# Altium PCB Gold_New.PCBDoc
Units mil, origin at the board's own origin, x right, y up, seen from the top; angles counter-clockwise.
Board outline 4705.63 x 1945.5 mil, 2 copper layers (Top Layer, Bottom Layer); 11 components, 64 nets, 196 pads, 18 vias.
Unrouted connection lines stored in the file: 11.
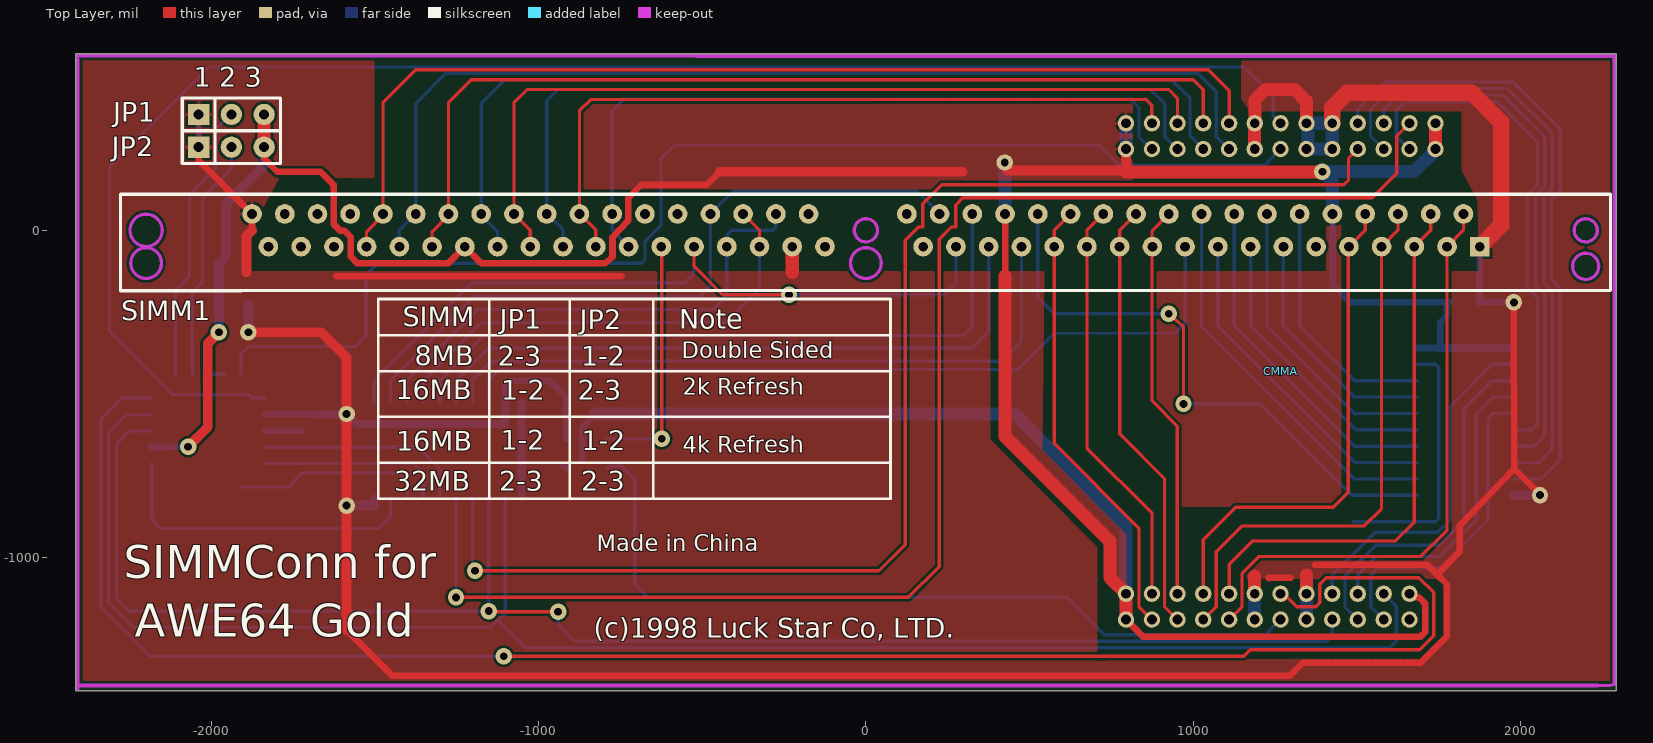
[diagram p0: Top Layer view]
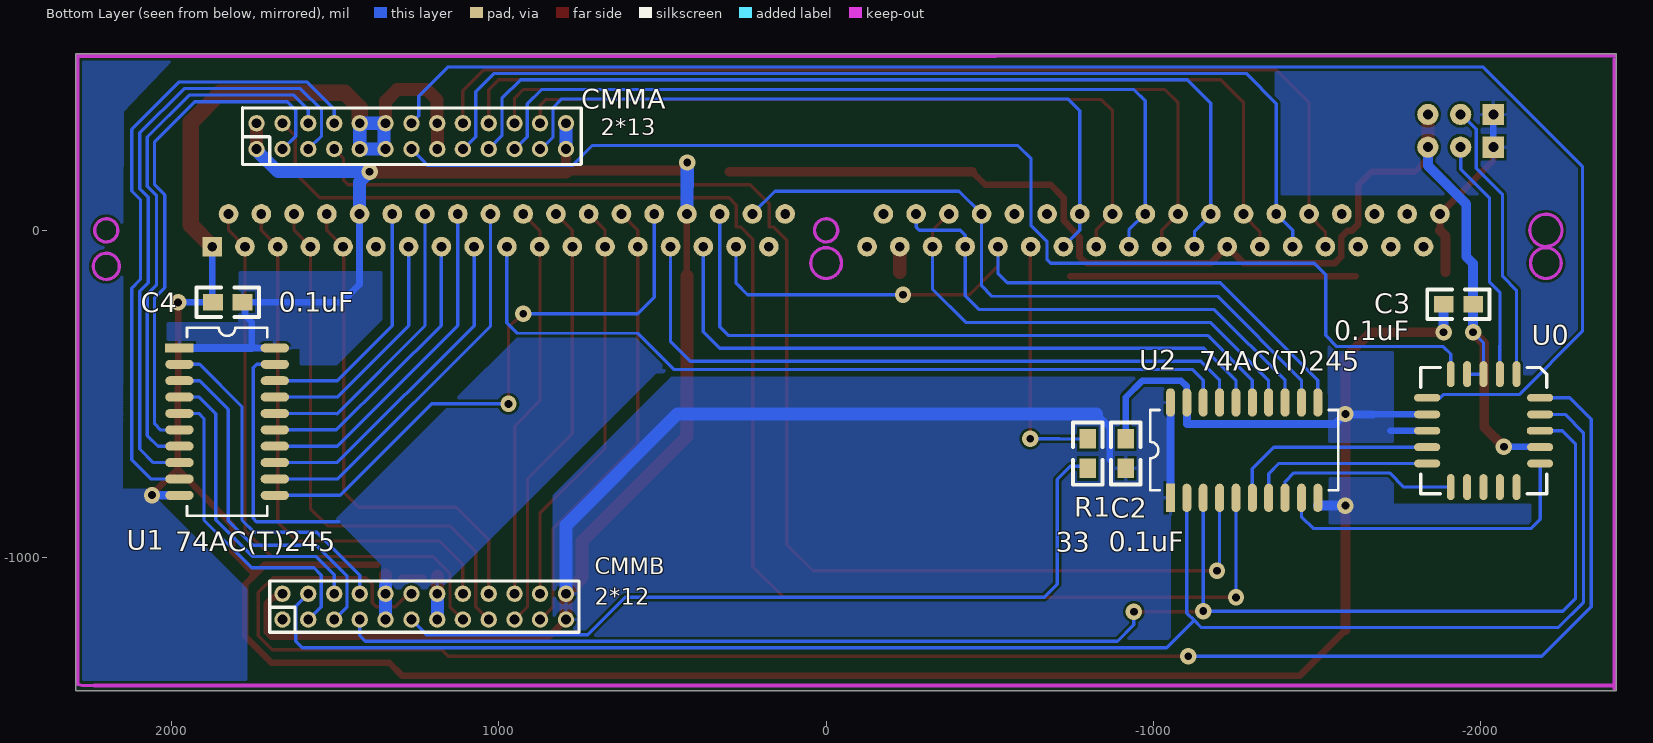
[diagram p1: Bottom Layer view, seen from below]

## Layer stack, top to bottom
Top Solder: solder mask 0.4, Solder Resist, Dk 3.5
Top Layer: signal copper 1.4
Dielectric 1: dielectric 12.6, FR-4, Dk 4.8
Bottom Layer: signal copper 1.4
Bottom Solder: solder mask 0.4, Solder Resist, Dk 3.5

## Board outline
-2413.63,-1406 2292,-1406 2292,539.5 -2413.63,539.5

## Design rules (kind name [scope] priority, off if disabled: settings)
Clearance [All] p1: gap=8 ignorepadtopadclearanceinfootprint=FALSE
PlaneClearance [All] p1: clearance=10
PolygonConnect [All] p1: connectstyle=Relief reliefconductorwidth=10 reliefentries=4 polygonreliefangle="90 Angle" airgapwidth=10
RoutingPriority RoutingPriority_28 [InNet('D15_1')] p1: routingpriority=2
RoutingPriority RoutingPriority_27 [InNet('D14_1')] p2: routingpriority=2
RoutingPriority RoutingPriority_26 [InNet('D13_1')] p3: routingpriority=2
RoutingPriority RoutingPriority_25 [InNet('D12_1')] p4: routingpriority=2
RoutingPriority RoutingPriority_24 [InNet('D11_1')] p5: routingpriority=2
RoutingPriority RoutingPriority_23 [InNet('D10_1')] p6: routingpriority=2
RoutingPriority RoutingPriority_22 [InNet('D9_1')] p7: routingpriority=2
RoutingPriority RoutingPriority_21 [InNet('D8_1')] p8: routingpriority=2
RoutingPriority RoutingPriority_20 [InNet('D7_1')] p9: routingpriority=2
RoutingPriority RoutingPriority_19 [InNet('D6_1')] p10: routingpriority=2
RoutingPriority RoutingPriority_18 [InNet('D5_1')] p11: routingpriority=2
RoutingPriority RoutingPriority_17 [InNet('D4_1')] p12: routingpriority=2
RoutingPriority RoutingPriority_16 [InNet('D3_1')] p13: routingpriority=2
RoutingPriority RoutingPriority_15 [InNet('D2_1')] p14: routingpriority=2
RoutingPriority RoutingPriority_14 [InNet('D1_1')] p15: routingpriority=2
RoutingPriority RoutingPriority_13 [InNet('D0_1')] p16: routingpriority=2
RoutingPriority RoutingPriority_12 [InNet('AB11_1')] p17: routingpriority=3
RoutingPriority RoutingPriority_11 [InNet('AB10_1')] p18: routingpriority=3
RoutingPriority RoutingPriority_10 [InNet('AB9_1')] p19: routingpriority=3
RoutingPriority RoutingPriority_9 [InNet('AB8_1')] p20: routingpriority=3
RoutingPriority RoutingPriority_8 [InNet('AB7_1')] p21: routingpriority=3
RoutingPriority RoutingPriority_7 [InNet('AB6_1')] p22: routingpriority=3
RoutingPriority RoutingPriority_6 [InNet('AB5_1')] p23: routingpriority=3
RoutingPriority RoutingPriority_5 [InNet('AB4_1')] p24: routingpriority=3
RoutingPriority RoutingPriority_4 [InNet('AB3_1')] p25: routingpriority=3
RoutingPriority RoutingPriority_3 [InNet('AB2_1')] p26: routingpriority=3
RoutingPriority RoutingPriority_2 [InNet('AB1_1')] p27: routingpriority=3
RoutingPriority RoutingPriority_1 [InNet('AB0_1')] p28: routingpriority=3
RoutingPriority [All] p29: routingpriority=4
RoutingVias RoutingVias_2 [InNet('GND')] p1: holewidth=20 width=60 viastyle="Through Hole" minholewidth=28 minwidth=50 maxholewidth=28 maxwidth=50
RoutingVias RoutingVias_1 [InNet('VCC')] p2: holewidth=20 width=60 viastyle="Through Hole" minholewidth=28 minwidth=50 maxholewidth=28 maxwidth=50
RoutingVias [All] p3: holewidth=20 width=50 viastyle="Through Hole" minholewidth=28 minwidth=50 maxholewidth=28 maxwidth=50
SolderMaskExpansion [All] p1: expansion=2
Width Width_2 [InNet('GND')] p1: maxlimit=50 minlimit=50 preferedwidth=10
Width Width_1 [InNet('VCC')] p2: maxlimit=50 minlimit=50 preferedwidth=10
Width [All] p3: maxlimit=10 minlimit=10 preferedwidth=10
28 further rules are at their usual default settings.

## Components (designator, comment, footprint, x,y, rotation, side; value= is the part's Value field where it differs from the comment)
C2 "0.1uF" 0805 -915.3,-726.6 r90 bottom
C3 "0.1uF" 0805 -1976.2,-226.16 r0 bottom
C4 "0.1uF" 0805 1782.5,-220.25 r0 bottom
CMMA "CMM50" CMM50 1666.4,-1190.02 r0 top
JP1 "1 2 3" SIP3 -2038,353.96 r0 top
JP2 "" SIP3 -2038,253.96 r0 top
R1 "33" 0805 -799.66,-727.14 r90 bottom
SIMM1 "SIMM72" SIMMr 0,0 r0 top
U0 "PALCE16V8H7JC/5(20)" PLCC20 -2180.86,-612.3 r270 bottom
U1 "74AC(T)245" SOP20 1975.1,-359.44 r180 bottom
U2 "74AC(T)245" SOP20 -1051.89,-817.08 r90 bottom

## Footprints (in the part's own frame and the unit in brackets; to place one, negate y for a bottom-side part, rotate by r counter-clockwise, add the part's x,y. Pads: shape width x height; smd on the part's side, far side on the other; paste and mask are expansions set on the pad)
0805 [mil]
  rect 60x50 smd: 1(0,0) 2(90,0)
  silkscreen extent -50,-45 140,45
CMM50 [mil]
  round 50 hole 30: 1-1(-6,1) 1-2(-6,80) 1-3(-85,1) 1-4(-85,80) 1-5(-164,1) 1-6(-164,80) 1-7(-242,1) 1-8(-242,80) 1-9(-321,1) 1-10(-321,80) 1-11(-400,1) 1-12(-400,80) 1-13(-479,1) 1-14(-479,80) 1-15(-557,1) 1-16(-557,80) 1-17(-636,1) 1-18(-636,80) 1-19(-715,1) 1-20(-715,80) 1-21(-793,1) 1-22(-793,80) 1-23(-872,1) 1-24(-872,80) 2-1(73,1438) 2-2(73,1517) 2-3(-6,1438) 2-4(-6,1517) 2-5(-85,1438) 2-6(-85,1517) 2-7(-164,1438) 2-8(-164,1517) 2-9(-242,1438) 2-10(-242,1517) 2-11(-321,1438) 2-12(-321,1517) 2-13(-400,1438) 2-14(-400,1517) 2-15(-479,1438) 2-16(-479,1517) 2-17(-557,1438) 2-18(-557,1517) 2-19(-636,1438) 2-20(-636,1517) 2-21(-715,1438) 2-22(-715,1517) 2-23(-793,1438) 2-24(-793,1517) 2-25(-872,1438) 2-26(-872,1517)
PLCC20 [mil]
  oct 24x80 smd: 1(0,0)
  oval 24x80 smd: 2(-50,0) 3(-101,0) 9(-101,-345) 10(-50,-345) 11(0,-345) 12(50,-345) 13(100,-345) 19(100,0) 20(50,0)
  oval 80x24 smd: 4(-173,-72) 5(-173,-123) 6(-173,-173) 7(-173,-223) 8(-173,-273) 14(172,-273) 15(172,-223) 16(172,-173) 17(172,-123) 18(172,-72)
  silkscreen extent -193,-365 192,20
SIMMr [mil]
  rect 60x60 hole 30: 1(1875,-50)
  round 60 hole 30: 2(1825,50) 3(1775,-50) 4(1725,50) 5(1675,-50) 6(1625,50) 7(1575,-50) 8(1525,50) 9(1475,-50) 10(1425,50) 11(1375,-50) 12(1325,50) 13(1275,-50) 14(1225,50) 15(1175,-50) 16(1125,50) 17(1075,-50) 18(1025,50) 19(975,-50) 20(925,50) 21(875,-50) 22(825,50) 23(775,-50) 24(725,50) 25(675,-50) 26(625,50) 27(575,-50) 28(525,50) 29(475,-50) 30(425,50) 31(375,-50) 32(325,50) 33(275,-50) 34(225,50) 35(175,-50) 36(125,50) 37(-125,-50) 38(-175,50) 39(-225,-50) 40(-275,50) 41(-325,-50) 42(-375,50) 43(-425,-50) 44(-475,50) 45(-525,-50) 46(-575,50) 47(-625,-50) 48(-675,50) 49(-725,-50) 50(-775,50) 51(-825,-50) 52(-875,50) 53(-925,-50) 54(-975,50) 55(-1025,-50) 56(-1075,50) 57(-1125,-50) 58(-1175,50) 59(-1225,-50) 60(-1275,50) 61(-1325,-50) 62(-1375,50) 63(-1425,-50) 64(-1475,50) 65(-1525,-50) 66(-1575,50) 67(-1625,-50) 68(-1675,50) 69(-1725,-50) 70(-1775,50) 71(-1825,-50) 72(-1875,50)
  Keep-Out Layer circle w10: c-2198.43,0 r49.21
  Keep-Out Layer circle w10: c2198.43,0 r35.43
  Keep-Out Layer circle w10: c0,0 r35.43
  Keep-Out Layer circle w10: c0,-100 r47
  Keep-Out Layer circle w10: c2198.43,-110 r40
  Keep-Out Layer circle w10: c-2198.43,-100 r47
  silkscreen extent -2276,-185 2274,110
SIP3 [mil]
  rect 65x65 hole 30: 1(0,0)
  round 65 hole 30: 2(100,0) 3(200,0)
  silkscreen extent -50,-50 250,50
SOP20 [mm]
  rect 2.2x0.7 smd: 1(0,0)
  oval 2.2x0.7 smd: 2(0,-1.27) 3(0,-2.54) 4(0,-3.81) 5(0,-5.08) 6(0,-6.35) 7(0,-7.62) 8(0,-8.89) 9(0,-10.16) 10(0,-11.43) 11(7.4,-11.43) 12(7.4,-10.16) 13(7.4,-8.89) 14(7.4,-7.62) 15(7.4,-6.35) 16(7.4,-5.08) 17(7.4,-3.81) 18(7.4,-2.54) 19(7.4,-1.27) 20(7.4,0)
  silkscreen extent 0.59,-13 6.81,1.57

## Via types
v1: diameter 50, hole 24, Top Layer to Bottom Layer, 18 vias

## Nets (pads, with @x,y where several pads share a name; then routed paths per layer and width w, separated by ;. In a path a pad name is that pad's centre, name@x,y a point inside that pad or via, vN(x,y) a via of type N, cw(c..) or ccw(c..) an arc to the next point about the centre after c; other vN are vias at no path point)
A0_1: CMMA.1-8 U1.2 | length 1076.6
  Bottom Layer w10: CMMA.1-8 1424.4,-1053.6 1556,-922 1747,-922 1784,-885 1784,-539 1913.56,-409.44 U1.2
A1_1: CMMA.1-5 U1.3 | length 1107.7
  Bottom Layer w10: CMMA.1-5 1463,-1149.62 1463,-1056 1557,-962 1751,-962 1826,-887 1826,-547 1913.56,-459.44 U1.3
A2_1: CMMA.1-6 U1.4 | length 945.8
  Bottom Layer w10: CMMA.1-6 1502,-1109.62 1502,-1052 1558,-996 1752,-996 1864,-884 1864,-560 1914.56,-509.44 U1.4
A3_1: CMMA.1-3 U1.5 | length 971.7
  Bottom Layer w10: CMMA.1-3 1581.02,-1189.02 1542,-1150 1542,-1053 1564,-1031 1754,-1031 1900,-885 1900,-575 1915.56,-559.44 U1.5
A4_1: CMMA.2-3 U1.6 | length 1600.6
  Bottom Layer w10: CMMA.2-3 1660.98,247.98 1660.68,248.28 1620,287 1620,367 1646,393 1928,393 2051,270 2051,139 2020,108 2020,-175 2051,-206 2051,-591 2032,-610 1975.66,-610 U1.6
A5_1: CMMA.2-6 U1.7 | length 1651
  Bottom Layer w10: CMMA.2-6 1581.4,368.4 1626,413 1945,413 2073,285 2073,134 2045,106 2045,-167 2073,-195 2073,-627 2040.56,-659.44 U1.7
A6_1: CMMA.2-5 U1.8 | length 1900.4
  Bottom Layer w10: CMMA.2-5 1581.4,248.4 1541,288 1541,368 1606,433 1961,433 2096,298 2096,127 2070,101 2070,-160 2096,-186 2096,-668 2054.56,-709.44 U1.8
A7_1: CMMA.2-8 U1.9 | length 1957.2
  Bottom Layer w10: CMMA.2-8 1502.4,369.4 1586,453 1976,453 2121,308 2121,120 2094,93 2094,-150 2121,-177 2121,-701 2062.56,-759.44 U1.9
A8_1: CMMA.2-7 U2.4 | length 4087.1
  Top Layer w10: v1(-1194,-1040) -879,-1040 -877,-1040 40,-1040 120,-960 120,-30 160,10 174,10 174,81 232,139 1460,139 1474,153 1474,219.59 CMMA.2-7
  Bottom Layer w10: v1@-1201.89,-1048.89 U2.4
A9_1: CMMA.2-4 U2.5 | length 4508.2
  Top Layer w10: v1(-1252,-1121) 130,-1121 224,-1027 224,-27 260,10 274,10 274,77 296,99 1546,99 1621,174 1621,288 1659.98,326.98 CMMA.2-4
  Bottom Layer w10: v1(-1252,-1121) -1252,-817.18 U2.5
A10_1: CMMA.1-4 U0.2 U2.2 | length 5235
  Bottom Layer w10: U0.2 -2257.3,-562.3 -2313,-618 -2313,-1137 -2236.89,-1213.11 -1145.89,-1213.11 -1123.89,-1191.11 ; U2.2 -1101.89,-1169.11 -1123.89,-1191.11 ; CMMA.1-4 1620,-1148.62 1620,-1255 1600,-1275 -1040,-1275 -1123.89,-1191.11
A11_1: CMMA.1-7 U0.1 U2.3 | length 4788.4
  Top Layer w10: v1(-1151.89,-1163.11) -1145,-1165 v1(-940,-1165)
  Bottom Layer w10: U0.1 -2248.3,-612.3 -2289,-653 -2289,-1124 -2249.89,-1163.11 v1(-1151.89,-1163.11) U2.3 ; v1(-940,-1165) -940,-1205 -890,-1255 1407,-1255 1424.4,-1237.6 CMMA.1-7
AB0_1: SIMM1.12 U1.18 | length 770.5
  Bottom Layer w10: SIMM1.12@1325,51 SIMM1.12 1325,-291 1493.44,-459.44 U1.18
AB1_1: SIMM1.13 U1.17 | length 740.2
  Bottom Layer w10: SIMM1.13 1275,-291 1493.44,-509.44 U1.17
AB2_1: SIMM1.14 U1.16 | length 911.7
  Bottom Layer w10: SIMM1.14 1225,-291 1493.44,-560.44 U1.16
AB3_1: SIMM1.15 U1.15 | length 881.1
  Bottom Layer w10: SIMM1.15 1175,-291 1495.44,-609.44 U1.15
AB4_1: SIMM1.16 U1.14 | length 1052.7
  Bottom Layer w10: SIMM1.16 1125,-291 1492.44,-659.44 U1.14
AB5_1: SIMM1.17 U1.13 | length 1023.2
  Bottom Layer w10: SIMM1.17 1075,-292 1493,-709 1676.2,-709 U1.13
AB6_1: SIMM1.18 U1.12 | length 1195
  Bottom Layer w10: SIMM1.18 1025,-293 1491.44,-759.44 U1.12
AB7_1: SIMM1.28 U1.11 | length 1800.4
  Top Layer w10: v1(925,-255) 970,-295 v1(970,-530)
  Bottom Layer w10: SIMM1.28 525,-205 575,-255 v1(925,-255) ; v1(970,-530) 1205,-530 1484.44,-809.44 U1.11
AB8_1: SIMM1.31 U2.16 | length 2016
  Bottom Layer w10: U2.16 -1251.89,-457.89 -1154,-360 325,-360 375,-310 SIMM1.31
AB9_1: SIMM1.32 U2.15 | length 2107.2
  Bottom Layer w10: U2.15 -1301.89,-457.89 -1165,-321 299,-321 325,-295 SIMM1.32
AB10_1: SIMM1.19 U2.18 | length 2499.8
  Bottom Layer w10: U2.18 -1151.89,-457.89 -1120,-426 465,-425 575,-315 943,-314 975,-282 SIMM1.19 SIMM1.19@975,-49
AB11_1: SIMM1.29 U2.17 | length 2084.6
  Bottom Layer w10: U2.17 -1201.89,-457.89 -1144,-400 415,-400 475,-340 SIMM1.29 SIMM1.29@475,-49
BASEM1_1: CMMA.2-14 U0.9 | length 4871.3
  Bottom Layer w10: U0.9 -1863.86,-511.3 -1874,-513.3 -1886,-501.3 -2118,-501 -2310,-309 -2310,195 -2006,499 1154,499 1244,409 1244,349.38 CMMA.2-14
BCAS0_1: SIMM1.40 SIMM1.43 U2.13 | length 1536.5
  Bottom Layer w10: U2.13 -1401.89,-457.89 -1186,-242 -466,-241 -425,-200 SIMM1.43 -425,-15 -410,0 -285,0 -275,10 SIMM1.40
BCAS2_1: SIMM1.41 SIMM1.42 U2.14 | length 1493.2
  Top Layer w10: SIMM1.42 -325,0 SIMM1.41
  Bottom Layer w10: U2.14 -1351.89,-501 -1351,-518 -1351,-458 -1175,-282 -426,-281 -325,-180 SIMM1.41
BRAS0_1: SIMM1.34 SIMM1.44 U2.12 | length 2170.3
  Bottom Layer w10: U2.12@-1451.89,-496.21 U2.12 -1451.89,-457.89 -1196,-202 -506,-201 -475,-170 SIMM1.44 -406,119 156,119 SIMM1.34
BRAS1_1: SIMM1.33 SIMM1.45 U2.11 | length 2283.7
  Top Layer w10: SIMM1.45 -525,-110 -438,-197 v1(-235,-197)
  Bottom Layer w10: U2.11 -1501.89,-457.89 -1204,-160 -554,-160 -525,-131 SIMM1.45 ; v1(-235,-197) 240,-197 275,-162 SIMM1.33
C\A\S\_1: CMMA.2-13 U0.8 | length 3805.7
  Bottom Layer w10: U0.8 -1907.86,-377.86 -1885,-355 -1560,-355 -1526,-321 -1526,-136 -1491,-101 -686,-101 -675,-90 -675,-35 -626,14 -626,219 -586,259 714,259 774,199 1218,199 1234,215 1234,215.59 CMMA.2-13
CAS0_1: U0.13 U2.7 | length 570.7
  Bottom Layer w10: U0.13 -1382.7,-712.3 -1351.89,-743.11 U2.7
CAS2_1: U0.12 U2.6 | length 650.2
  Bottom Layer w10: U0.12 -1367.7,-662.3 -1301.89,-728.11 U2.6
CASD_1: U0.15
CBR_1: U0.16
D0_1: CMMA.1-15 SIMM1.2 SIMM1.3 | length 1825.4
  Top Layer w10: CMMA.1-15 1109.4,-1188.6 1110.4,-1188.6 1149,-1150 1149,-1048 1201,-996 1695,-996 1775,-916 SIMM1.3 1825,0 SIMM1.2
D1_1: CMMA.1-16 SIMM1.4 SIMM1.5 | length 1669.7
  Top Layer w10: CMMA.1-16 1109.4,-1020.6 1180,-950 1616,-949 1675,-891 SIMM1.5 1725,0 SIMM1.4
D2_1: CMMA.1-17 SIMM1.6 SIMM1.7 | length 1704.2
  Top Layer w10: CMMA.1-17 1030.98,-1189.02 1070,-1150 1070,-982 1149,-903 1522,-903 1575,-850 SIMM1.7 1625,0 SIMM1.6
D3_1: CMMA.1-18 SIMM1.8 SIMM1.9 | length 1538.7
  Top Layer w10: CMMA.1-18 1030.4,-944.6 1129,-846 1427,-846 1473,-800 1473,-68 SIMM1.9 1525,0 SIMM1.8
D4_1: CMMA.1-20 SIMM1.20 SIMM1.21 | length 1212.5
  Top Layer w10: SIMM1.20 874,-2 874,-521 951,-599 951,-1108.02 CMMA.1-20
D5_1: CMMA.1-19 SIMM1.22 SIMM1.23 | length 1332.8
  Top Layer w10: SIMM1.22 775,0 SIMM1.23 775,-622 912,-759 912,-1149.62 CMMA.1-19
D6_1: CMMA.1-22 SIMM1.24 SIMM1.25 | length 1263.2
  Top Layer w10: SIMM1.24 675,0 SIMM1.25 675,-665 874,-864 874,-1073.02 CMMA.1-22
D7_1: CMMA.1-21 SIMM1.26 SIMM1.27 | length 1383.3
  Top Layer w10: SIMM1.26 575,0 SIMM1.27 575,-651 834,-910 834,-1149.62 CMMA.1-21
D8_1: CMMA.2-23 SIMM1.49 SIMM1.50 | length 2215.3
  Bottom Layer w10: SIMM1.49 -775,0 SIMM1.50 -775,365 -740,400 -740,401 809,400 834,375 834,285 871.01,247.98 CMMA.2-23
D9_1: CMMA.2-24 SIMM1.51 SIMM1.52 | length 2260.4
  Top Layer w10: SIMM1.51 -825,1 SIMM1.52 -875,365 -840,399 855,400 873.4,381.6 CMMA.2-24
D10_1: CMMA.2-21 SIMM1.53 SIMM1.54 | length 2541.6
  Bottom Layer w10: SIMM1.54 SIMM1.54@-975,51 ; SIMM1.53 -925,1 SIMM1.54@-975,51 ; CMMA.2-21 951.01,247.98 913,286 913,386 869,430 -940,430 -975,395 SIMM1.54@-975,51
D11_1: CMMA.2-22 SIMM1.55 SIMM1.56 | length 2595.2
  Top Layer w10: SIMM1.55@-1025,-54 SIMM1.55 -1025,0 SIMM1.56 -1075,390 -1035,430 925,430 951.4,403.6 CMMA.2-22
D12_1: CMMA.2-19 SIMM1.57 SIMM1.58 | length 2852.9
  Bottom Layer w10: SIMM1.57@-1125,-54 SIMM1.57 -1125,-4 -1175,46 SIMM1.58 -1175,388 -1103,460 933,460 990,403 990,288.38 CMMA.2-19
D13_1: CMMA.2-20 SIMM1.60 SIMM1.61 | length 2914.3
  Top Layer w10: SIMM1.61@-1325,-54 SIMM1.61 -1325,-4 -1275,46 SIMM1.60 -1275,390 -1205,460 1000,460 1030.4,429.6 CMMA.2-20
D14_1: CMMA.2-17 SIMM1.62 SIMM1.63 | length 3156.2
  Bottom Layer w10: SIMM1.63 -1425,0 SIMM1.62 -1375,387 -1283,479 1014,479 1070,423 1070,286 1108.01,247.98 CMMA.2-17
D15_1: CMMA.2-18 SIMM1.64 SIMM1.65 | length 3215.8
  Top Layer w10: SIMM1.65@-1525,-54 SIMM1.65 -1525,-4 -1475,46 SIMM1.64 -1475,390 -1375,490 1045,490 1109.4,425.6 CMMA.2-18
GND: C2.2 C3.2 C4.2 CMMA.1-9 CMMA.1-10 CMMA.1-13 CMMA.1-14 CMMA.2-9 CMMA.2-10 CMMA.2-11 CMMA.2-12 CMMA.2-15 CMMA.2-16 JP1.1 JP2.1 SIMM1.1 SIMM1.39 SIMM1.72 U0.10 U0.11 U1.10 U1.19 U2.10 U2.19 | length 12643.4
  Top Layer w20: JP2.1 -2038,213 SIMM1.72 -1875,-1 ; -1617,-141 -746,-141 ; -1586,-1221 -1446,-1361 1294,-1361 1334,-1321 1694,-1321 1774,-1241 1774,-1081 1744,-1051 ; CMMA.2-16@1174,326.98 CMMA.2-16 ; CMMA.1-14 1187.4,-1101 1189.72,-1101.64 CMMA.1-14@1191,-1102 ; 1231,-1062 1297,-1061 ; CMMA.2-12@1334,339 1334,326.98 CMMA.2-12 ; 1371,-1021 1714,-1021 1744,-1051 ; v1@1987,-217 1983.04,-222.94 1979,-229 1980,-728 ; v1@2060,-808 1980,-728 ; 1744,-1051 1814,-981 1814,-901 1980,-728
  Top Layer w30: -1892,-128 -1892,-18 -1875,-1 ; v1(-1886.2,-311.2) -1663.8,-311.2 -1586,-389 v1(-1586,-561) v1(-1586,-841) -1586,-1221
  Top Layer w40: -225,-128 SIMM1.39 ; CMMA.1-14 1187.4,-1056.4 ; CMMA.2-15 CMMA.2-16 1188,327.59 1188,398 1220,430 1310,430 1345.4,394.6 CMMA.2-12 ; CMMA.1-10 1345.4,-1052.4
  Top Layer w50: CMMA.2-10 1424.4,374.4 1470,420 1850,420 1940,330 1940,15 SIMM1.1
  Bottom Layer w10: 1488.82,-890 1740,-890 1750,-880 1750,-420 1739.44,-409.44 U1.19
  Bottom Layer w20: JP2.1 JP1.1 ; U0.11 -1722.7,-612.3 ; U0.10 -1670,-562.3 ; v1@-1587.3,-562.3 v1(-1586,-561) ; U2.10@-1501.89,-841 U2.10 ; U2.19 -1101.89,-476.89 -1085,-460 -965,-460 -915.3,-509.7 C2.2 ; CMMA.1-13@1174,-1189.02 CMMA.1-13 ; CMMA.1-14@1174,-1110.02 1187,-1110.02 CMMA.1-14 ; CMMA.2-15@1174,247.98 CMMA.2-15 ; C4.2 C4.2@1875,-220.25 ; SIMM1.1 C4.2@1875,-220.25 ; U1.10@1974,-809.44 U1.10 ; v1@1987,-217 1983.75,-220.25 v1(1979,-220.25) C4.2@1875,-220.25
  Bottom Layer w25: -1670,-562.3 v1@-1587.3,-562.3 ; v1(-1586,-561) -1555.11,-591.89 -1101.89,-591.89 U2.19 ; U1.10 2058.56,-809.44 v1(2059,-809)
  Bottom Layer w30: v1(-1886.2,-311.2) C3.2 ; v1(-1586,-841) U2.10@-1501.89,-841
  Bottom Layer w40: CMMA.1-13@1187,-1187.02 1187,-1110.02 CMMA.1-14@1187,-1108.02 ; CMMA.1-9 CMMA.1-10 1345.4,-1084.6 ; CMMA.2-11 CMMA.2-11@1350,247.98 ; CMMA.2-12 CMMA.2-12@1350,326.98 ; CMMA.2-11@1350,247.98 CMMA.2-9 CMMA.2-10 CMMA.2-12@1350,326.98 ; CMMA.2-11@1350,247.98 CMMA.2-12@1350,326.98
N00004: CMMA.1-1
N00011: R1.2 SIMM1.47 | length 753.5
  Top Layer w10: SIMM1.47 -623.66,-50.66 v1(-623.66,-636.66)
  Bottom Layer w10: R1.2@-789.66,-637.14 -746.66,-637.14 -712,-637 v1(-623.66,-636.66)
N00032: SIMM1.67
N00033: SIMM1.68
PD1_1: JP1.2 U0.4 | length 865.9
  Bottom Layer w10: U0.4 -2109,-439.16 -2109,-184 -2066,-141 -2066,109 -1986,189 -1986,309 -1941.04,353.96 JP1.2
PD2_1: JP2.2 U0.5 | length 743
  Bottom Layer w10: U0.5 -2057.86,-392.14 -2058,-308 -2058,-189 -2026,-157 -2026,99 -1938,187 JP2.2
R\A\S\_1: CMMA.1-12 U0.3 | length 5634.4
  Top Layer w10: v1(-1106,-1301) 1154,-1301 1174,-1281 1692,-1281 1734,-1239 1734,-1106 1689,-1061 1406,-1061 1386,-1081 1386,-1138 1374,-1150 1316,-1150 1267,-1101 1266.4,-1101 CMMA.1-12
  Bottom Layer w10: U0.3 -2271.3,-511.3 -2337,-577 -2337,-1150 -2186,-1301 v1(-1106,-1301)
RA10_1: U0.17
RA11_1: U0.18
RAS0_1: U0.14 U2.8 | length 584.1
  Bottom Layer w10: U0.14 -1764.3,-784.3 -1721,-741 -1429,-741 -1401.89,-768.11 U2.8
RAS1_1: U0.19 U2.9 | length 983.4
  Bottom Layer w10: U0.19 -2180.86,-742.86 -2181,-743 -2181,-882 -2152,-911 -1489,-911 -1451.89,-874.89 U2.9
VCC: C2.1 C3.1 C4.1 CMMA.1-2 CMMA.1-23 CMMA.1-24 CMMA.2-1 CMMA.2-2 CMMA.2-25 CMMA.2-26 JP1.3 JP2.3 SIMM1.10 SIMM1.30 SIMM1.59 U0.6 U0.7 U0.20 U1.1 U1.20 U2.1 U2.20 | length 11926.1
  Top Layer w20: JP2.3 -1838,219 -1798,179 -1666,179 -1626,139 -1626,19 -1606,-1 -1593,-1 -1573,-21 -1573,-81 -1553,-101 -1276,-101 SIMM1.59 -1174,-101 -797,-101 -774,-81 -774,-21 -726,30 -726,99 -686,139 -486,139 -446,179 ; 425,-140 SIMM1.30 ; CMMA.2-25@794,247.98 CMMA.2-25 ; CMMA.1-23 834,-1228.62 834,-1229 846,-1241 1694,-1241 1709,-1226 1709,-1141 1689,-1121 1654,-1121 1654,-1110.02 CMMA.1-2
  Top Layer w30: v1(-2070,-661) -2010,-601 -2010.14,-345.14 v1(-1976.2,-311.2) ; -446,179 296,179 ; 432,183 790,183 795,178 CMMA.2-25@794,247.98
  Top Layer w40: JP2.3 JP1.3 ; 425,-140 425,-630 745,-950 745,-1060.62 CMMA.1-24 CMMA.1-23 ; 795,178 v1@1394,178 ; CMMA.2-1 CMMA.2-2
  Bottom Layer w10: v1(-1976.2,-311.2) -2007.72,-342.72 U0.6 U0.7
  Bottom Layer w20: U0.20@-2184,-661 v1(-2070,-661) ; U0.20 -2152.86,-662.3 U0.20@-2152.86,-663 ; U2.1 -1051.89,-787.55 -1051.89,-771 ; C2.1@-926,-721 -915.3,-721 C2.1 ; -866,-701 -866,-601 -826,-561 ; 794,-901 794.4,-901 ; CMMA.2-25@794,247.98 CMMA.2-25 ; 1425,-165 1480.25,-220.25 C4.1@1774,-220.25 ; U1.20 1754,-359.44 1754,-281 1774,-261 C4.1@1774,-220.25 ; CMMA.2-1@1734,239 1739.4,239 CMMA.2-1 ; C4.1 C4.1@1774,-220.25
  Bottom Layer w22: 1425,-165 SIMM1.10
  Bottom Layer w25: -1051.89,-771 U2.20 ; 1754,-359.44 U1.1
  Bottom Layer w30: v1(-1976.2,-311.2) C3.1 -1976.2,-101.2 -1955,-80 -1955.2,80.84 -1838,197 JP2.3
  Bottom Layer w40: -826,-561 454,-561 794,-901 ; v1(424,207) SIMM1.30 ; CMMA.1-24 794.4,-901 ; CMMA.2-25 CMMA.2-26 ; SIMM1.10 1425,148 v1(1394,179) 1674,179 CMMA.2-1@1734,239
W\E\_1: CMMA.1-11 R1.1 | length 2478.4
  Bottom Layer w10: R1.1@-789.66,-727.14 -783.52,-721 -746,-721 -706,-761 -706,-1081 -666,-1121 614,-1121 728,-1235 1221,-1235 1234,-1222 1234,-1221.41 CMMA.1-11
pads on no net: SIMM1.11 SIMM1.35 SIMM1.36 SIMM1.37 SIMM1.38 SIMM1.46 SIMM1.48 SIMM1.66 SIMM1.69 SIMM1.70 SIMM1.71

## Polygon pours and split planes (outlines as drawn)
VCC on Top Layer "Top Layer-VCC" (hatched 90Degree grid 8 track 10, remove dead copper, pour order 20): -2586,-1421
GND on Top Layer "Top Layer-GND" (hatched 90Degree grid 8 track 10, remove dead copper, pour order 18): -2586,-1421
GND on Top Layer "Top Layer-GND 1" (hatched 90Degree grid 20 track 20.08, remove dead copper, pour order 16): -2586,-1421
VCC on Top Layer "Top Layer-VCC 1" (hatched 90Degree grid 8 track 10, remove dead copper, pour order 14): -2586,-1421
VCC on Top Layer "Top Layer-VCC 2" (none, remove dead copper, pour order 12): -2586,-1421
GND on Top Layer "Top Layer-GND 2" (hatched 90Degree grid 8 track 10, remove dead copper, pour order 10): -2586,-1421
VCC on Top Layer "Top Layer-VCC 3" (none, remove dead copper, pour order 8): -2586,-1421
GND on Top Layer "Top Layer-GND 3" (hatched 90Degree grid 20 track 8, remove dead copper, pour order 6): -2586,-1421
GND on Top Layer "Top Layer-GND 4" (hatched 90Degree grid 8 track 10, remove dead copper, pour order 4): -2586,-1421
VCC on Top Layer "Top Layer-VCC 4" (hatched 90Degree grid 8 track 10, remove dead copper, pour order 2): -2586,-1421
GND on Top Layer "Top Layer-GND 5" (hatched 90Degree grid 8 track 10, remove dead copper, pour order 0): -2586,-1421
VCC on Bottom Layer "Bottom Layer-VCC" (none, remove dead copper, pour order 44): -2586,-1421
VCC on Bottom Layer "Bottom Layer-VCC 1" (none, remove dead copper, pour order 42): -2586,-1421
VCC on Bottom Layer "Bottom Layer-VCC 2" (hatched 90Degree grid 8 track 10, remove dead copper, pour order 40): -2586,-1421
VCC on Bottom Layer "Bottom Layer-VCC 3" (none, remove dead copper, pour order 38): -2586,-1421
VCC on Bottom Layer "Bottom Layer-VCC 4" (none, remove dead copper, pour order 36): -2586,-1421
GND on Bottom Layer "Bottom Layer-GND" (hatched 90Degree grid 8 track 10, remove dead copper, pour order 34): -2586,-1421
GND on Bottom Layer "Bottom Layer-GND 1" (hatched 90Degree grid 8 track 10, remove dead copper, pour order 32): -2586,-1421
VCC on Bottom Layer "Bottom Layer-VCC 5" (hatched 90Degree grid 8 track 10, remove dead copper, pour order 30): -2586,-1421
GND on Bottom Layer "Bottom Layer-GND 2" (hatched 90Degree grid 8 track 10, remove dead copper, pour order 28): -2586,-1421
VCC on Bottom Layer "Bottom Layer-VCC 6" (none, remove dead copper, pour order 26): -2586,-1421
VCC on Bottom Layer "Bottom Layer-VCC 7" (none, remove dead copper, pour order 24): -2586,-1421
GND on Bottom Layer "Bottom Layer-GND 3" (hatched 90Degree grid 8 track 10, remove dead copper, pour order 22): -2586,-1421

## Keep-outs
Keep-Out Layer:
  lines w10: 2234,-1390 2272.55,-1390 2286,-1386.55 2286,532.96
  lines w12: -2407.63,533.5 -507,533 ; -2407.32,-1400 -2407.32,522 ; -2407.32,-1390 2234,-1390 ; -518,533 2286,532.96

## Silkscreen, mask and mechanical layers (free items; w line width, h text height)
Top Overlay:
  lines w8: -1490,-710 -650,-710 75,-710 ; -1490,-570 -650,-570 75,-570 ; -1490,-430 -650,-430 75,-430 ; -1490,-320 -650,-320 75,-320 ; -1150,-815 -1150,-210 ; -904,-210 -904,-816 -900,-820 ; -650,-819 75,-820 75,-210 -650,-210 ; -650,-819 -650,-230 -650,-210 ; -650,-819 -1490,-820 -1490,-235 -1490,-210 -650,-210
  text "SIMM" at -1415,-293 h60
  text "Note" at -570,-300 h60
  text "JP1" at -1118,-301 h60
  text "JP2" at -874,-302 h60
  text "Double Sided" at -562,-391 h50
  text "8MB" at -1377.66,-412 h60
  text "2-3" at -1124,-413 h60
  text "1-2" at -869.96,-413 h60
  text "2k Refresh" at -560,-503 h50
  text "16MB" at -1435.44,-515.59 h60
  text "2-3" at -880,-517 h60
  text "1-2" at -1114,-518 h60
  text "1-2" at -1115.11,-671 h60
  text "1-2" at -867.66,-671.14 h60
  text "16MB" at -1435,-673 h60
  text "4k Refresh" at -560,-680 h50
  text "2-3" at -1120,-795 h60
  text "2-3" at -870,-795 h60
  text "32MB" at -1441,-796 h60
  text "Made in China" at -822,-980 h50
  text "SIMMConn for" at -2267,-1062 h100
  text "AWE64 Gold" at -2233.77,-1241.23 h100
  text "(c)1998 Luck Star Co, LTD." at -830.54,-1245 h60
Bottom Overlay:
  text "2*13" at 688,291 h50
  text "2*12" at 706,-1143 h50

## Text inside footprints (layer, text, board x,y; h text height)
CMMA: Bottom Overlay "CMMB" at 706.4,-1050.02 h50